# Altium PCB PWM-SWITCH.PcbDoc
Units mil, origin at the board's own origin, x right, y up, seen from the top; angles counter-clockwise.
Board outline 6000 x 4000 mil, 2 copper layers (Top Layer, Bottom Layer); 6 components, 0 nets, 22 pads, 6 vias.
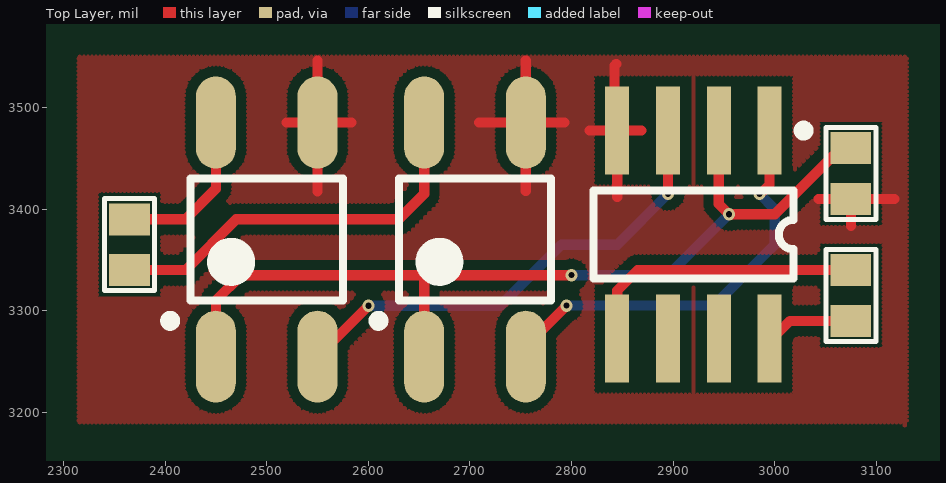
[diagram p0: Top Layer view]
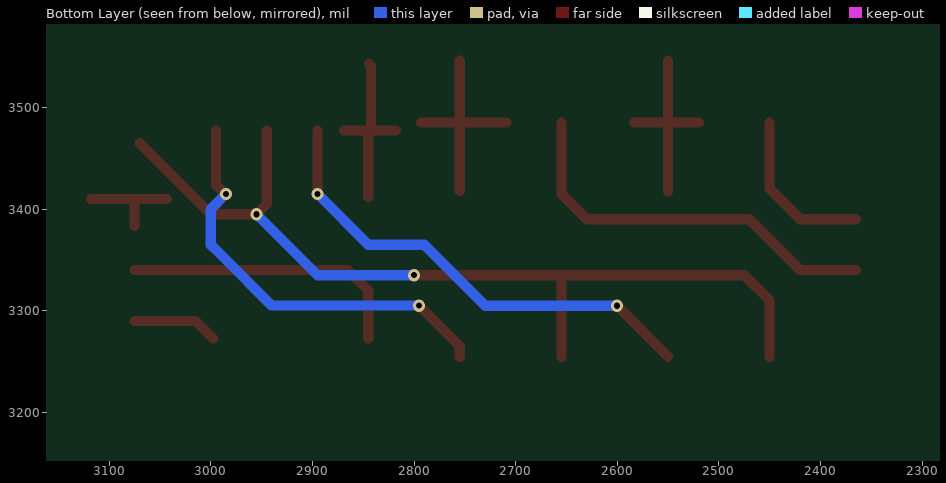
[diagram p1: Bottom Layer view, seen from below]

## Layer stack, top to bottom
Top Layer: signal copper 1.4
Dielectric: dielectric 12.6, FR-4, Dk 4.8
Bottom Layer: signal copper 1.4

## Board outline
1000,1000 7000,1000 7000,5000 1000,5000

## Design rules (kind name [scope] priority, off if disabled: settings)
Clearance [All] p1: gap=10
PolygonConnect [All] p1: connectstyle=Relief reliefconductorwidth=10 reliefentries=4 polygonreliefangle="90 Angle" airgapwidth=10
RoutingVias [All] p1: holewidth=28 width=50 viastyle="Through Hole" minholewidth=28 minwidth=50 maxholewidth=28 maxwidth=50
SilkscreenOverComponentPads [All] p1: minsilkscreentomaskgap=10
SolderMaskExpansion [All] p1: expansion=4
Width [All] p1: maxlimit=10 minlimit=10 preferedwidth=10
27 further rules are at their usual default settings.

## Components (designator, comment, footprint, x,y, rotation, side; value= is the part's Value field where it differs from the comment)
? "Comment" SO8 2920,3375 r180 top
? "Comment" SOP-4 2500,3370 r90 top
? "Comment" SOP-4 2705,3370 r90 top
? "Comment" "TOUCH JMP 2PAD" 3075,3435 r180 top
? "Comment" "TOUCH JMP 2PAD" 3075,3315 r180 top
? "Comment" "TOUCH JMP 2PAD" 2365,3365 r180 top

## Footprints (in the part's own frame and the unit in brackets; to place one, negate y for a bottom-side part, rotate by r counter-clockwise, add the part's x,y. Pads: shape width x height; smd on the part's side, far side on the other; paste and mask are expansions set on the pad)
SO8 [mm] "Small Outline; 8 Leads; Body Width 3.9 mm; Pitch 1.27 mm"
  rect 0.6x2.2 smd: 1(-1.905,-2.6) 2(-0.635,-2.6) 3(0.635,-2.6) 4(1.905,-2.6) 5(1.905,2.6) 6(0.635,2.6) 7(-0.635,2.6) 8(-1.905,2.6)
  silkscreen extent -2.88,-2.72 2.5,1.1
SOP-4 [mm] "SOP, 4-Leads, Body 2.7x4.5mm (max), Pitch 1.27mm, IPC Medium Density"
  oval 2.3x1 smd: 1(-2.927,1.27) 2(-2.927,-1.27) 3(2.927,-1.27) 4(2.927,1.27)
  silkscreen extent -2.15,-1.91 1.52,2.54, body extent -3.5,-2.45 3.5,2.45, height 2.9
"TOUCH JMP 2PAD" [mil] "Touch Jumper 2 Pad"
  rect 40x31.5 smd mask+0: 1(0,25) 2(0,-25)
  silkscreen extent -25,-45 25,45

## Via types
v1: diameter 12, hole 6, Top Layer to Bottom Layer, 6 vias

## Nets (pads, with @x,y where several pads share a name; then routed paths per layer and width w, separated by ;. In a path a pad name is that pad's centre, name@x,y a point inside that pad or via, vN(x,y) a via of type N, cw(c..) or ccw(c..) an arc to the next point about the centre after c; other vN are vias at no path point)
pads on no net: ?.1 ?.2 ?.3 ?.4 ?.5 ?.6 ?.7 ?.8
copper on no net: | length 3415.9
  Top Layer w10: 2365,3340 2420,3340 2470,3390 2630,3390 2655,3415 2655,3485.24 ; 2365,3390 2420,3390 2450,3420 2450,3485.24 ; 2450,3254.76 2450,3310 2475,3335 v1(2800,3335) ; 2519.55,3485.24 2550,3485.24 ; 2550,3254.76 v1(2600.12,3304.88) ; 2550,3417.51 2550,3485.24 ; 2550,3546.22 2550,3485.24 ; 2583.24,3485.24 2550,3485.24 ; 2655,3254.76 2655,3335 ; 2709.24,3485.24 2755,3485.24 ; 2755,3254.76 2755,3265 v1(2795,3305) ; 2755,3418 2755,3485.24 ; 2755,3546.25 2755,3485.24 ; 2793.24,3485.24 2755,3485.24 ; 2817.64,3477.36 2845,3477.36 ; 2844,3543 2842.36,3541.36 2842.36,3477.36 2845,3477.36 ; 2845,3272.64 2845,3320 2865,3340 3075,3340 ; 2845,3412 2845,3477.36 ; 2868.81,3477.36 2845,3477.36 ; v1(2895,3415) 2895,3425 2895,3477.36 ; 2945,3477.36 2945,3405 v1(2955,3395) 3000,3395 3070,3465 ; v1(2985,3415) 2985.95,3415 2990,3419.05 2995,3424.05 2995,3477.36 ; 2997.64,3272.64 3015,3290 3075,3290 ; 3043,3410 3075,3410 ; 3075,3383.25 3075,3410 ; 3118,3410 3075,3410
  Bottom Layer w10: v1(2600.12,3304.88) 2729.88,3304.88 2790,3365 2845,3365 v1(2895,3415) ; v1(2795,3305) 2940,3305 2990,3355 3000,3365 3000,3400 v1(2985,3415) ; v1(2800,3335) 2895,3335 v1(2955,3395)

## Polygon pours and split planes (outlines as drawn)
no net on Top Layer "Top Layer-No Net" (hatched 90Degree grid 0 track 4, remove dead copper, pour order 4): 3130,3550 3130,3185 3125,3190 2315,3190 2315,3550